# EAGLE board open-lux-T (EAGLE 6.5.0)
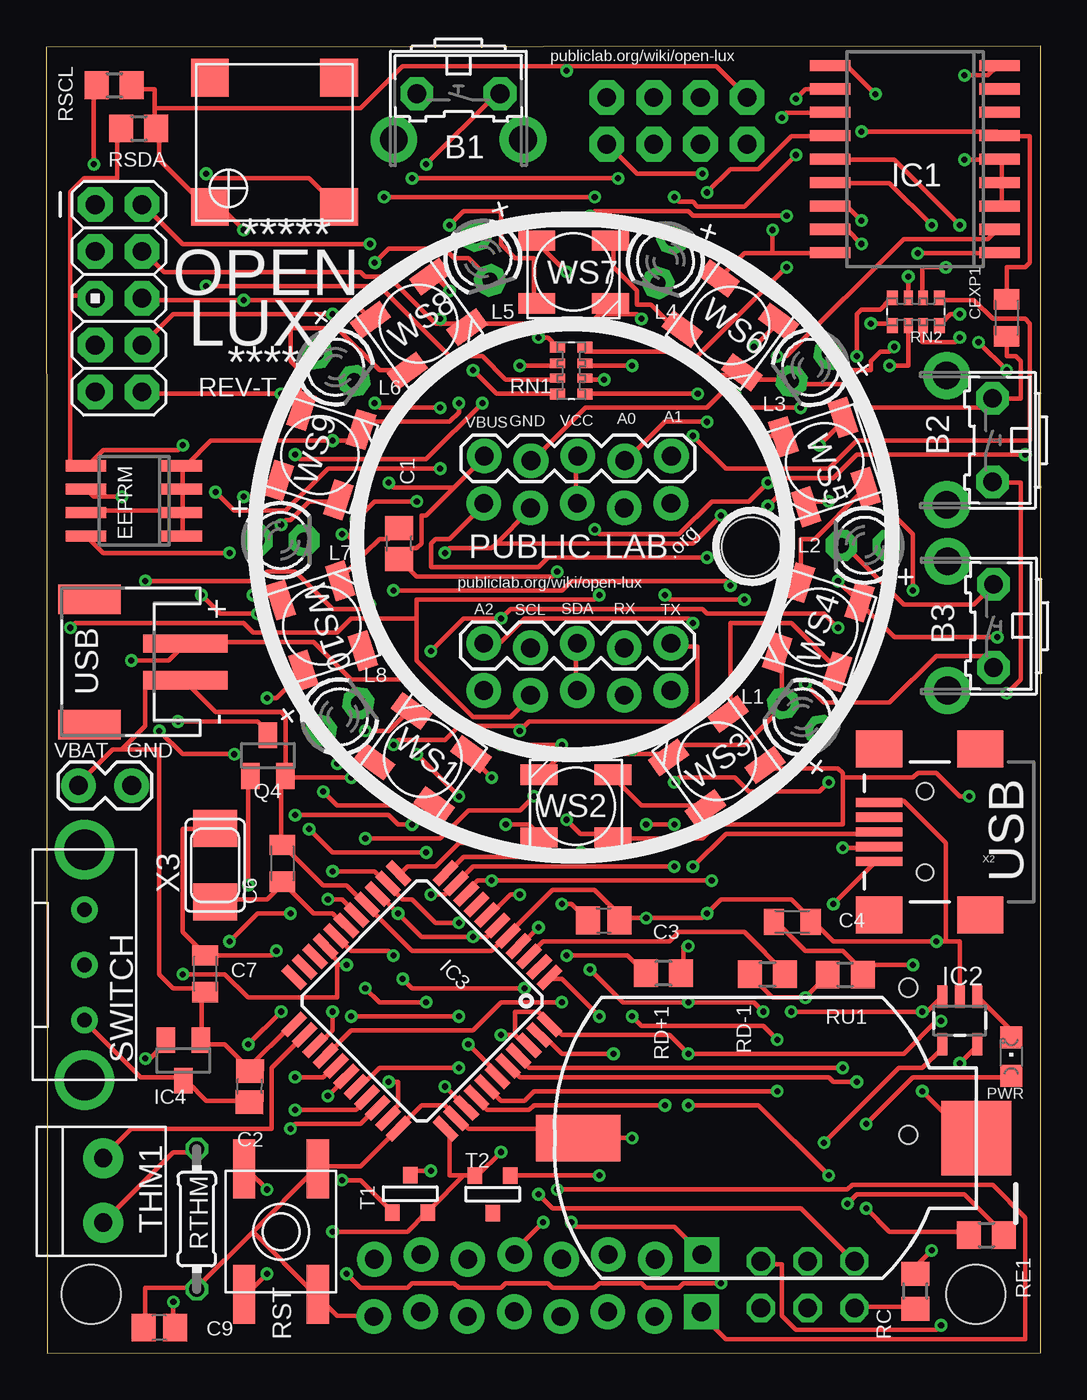
[diagram p0: board, top side]
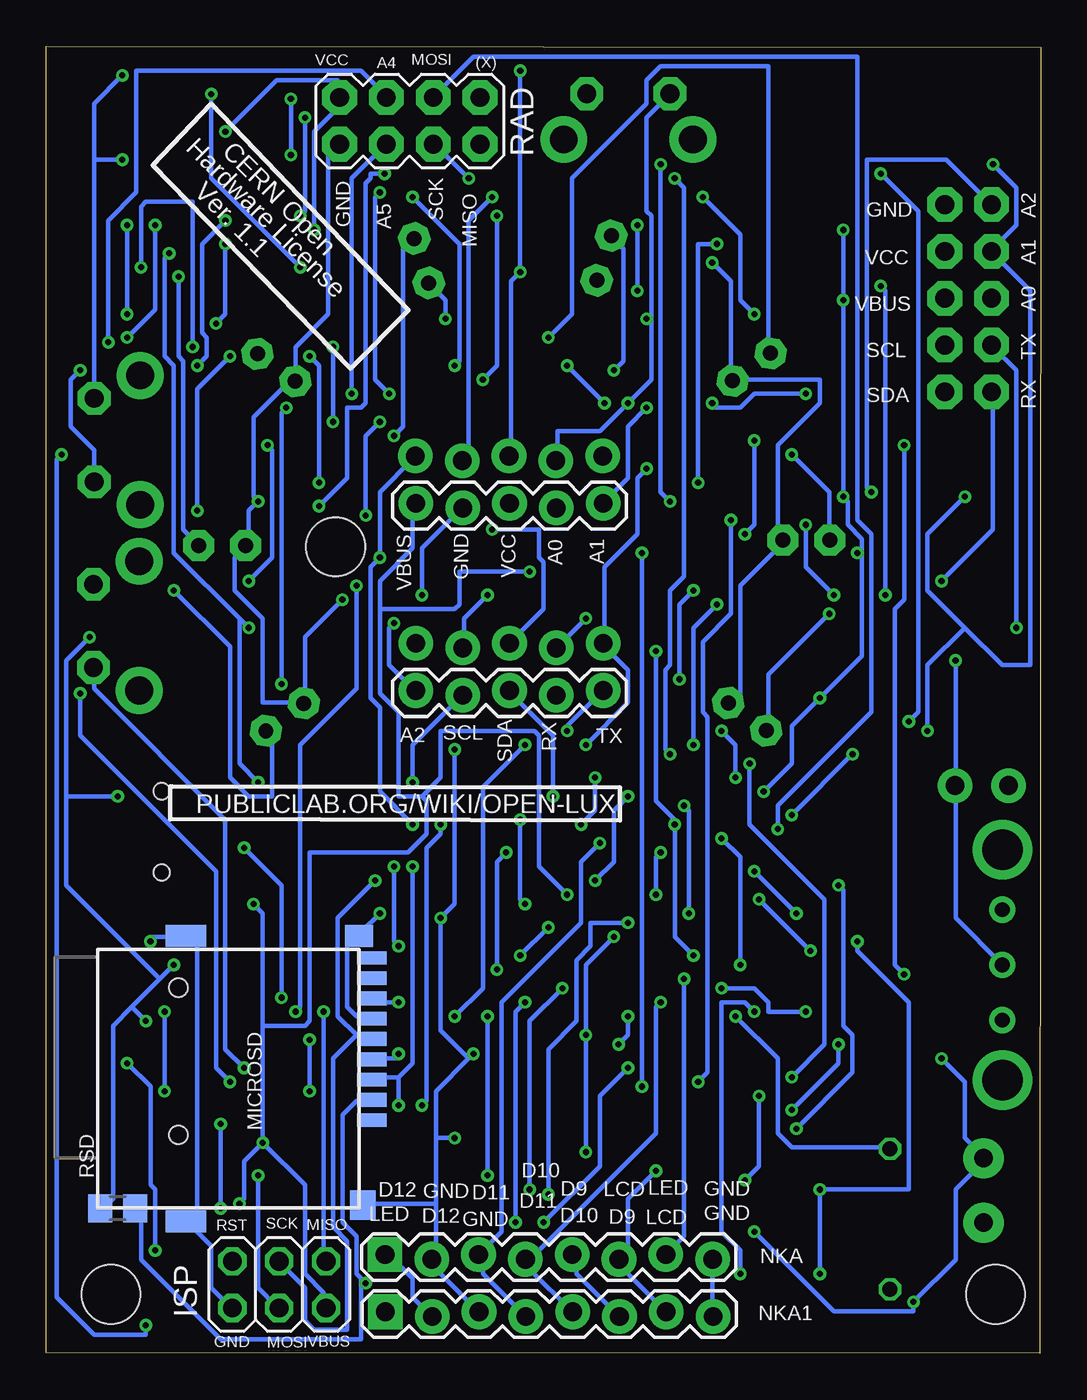
[diagram p1: board, bottom side, seen from below]

Size 53.98 x 70.93 mm. Coordinates in mm from the lower left corner, seen from the top.
Outline: 0.05,0 53.97,0.03 53.97,70.93 0,70.88 0.05,0
Copper layers (1*16): Top 0.0356mm / dielectric 1.5011mm / Bottom 0.0356mm
Design rules "LaenPCBOrder": minimum track width 6mil, minimum drill 13mil, track to track 6mil, track to pad 6mil, pad to pad 6mil, via to via 6mil, smd to smd 6mil, copper to edge 15mil, drill to drill 6mil, minimum pad ring 7mil, minimum via ring 7mil, stop-mask expansion 3mil, vias tented up to drill 0mil, thermal gap 10mil
Net classes: 0 default: width 0.254 mm, clearance 0.254 mm; 1 power: width 0.813 mm, clearance 0.203 mm
Holes 3.2 mm at 50.45,3.2 2.45,3.2 38.26,43.76

## Footprints (pad centres in the part's own frame; a part is rotated, then mirrored left to right if it is on the bottom)
B3F-31XX = drill 1.016 pad 1.778 octagon: 1 -2.261,-1.245; 2 2.261,-1.245 | drill 1.499 pad 2.54: 3 -3.505,1.245; 4 3.505,1.245
BATTCOM_20MM_PTH_SMT = smd 4.572 x 2.54: P$1 0,0 | smd 3.81 x 4.064: P$2 21.59,0
C0805 = smd 1.3 x 1.5: 1 -0.85,0; 2 0.85,0
C0805K = smd 1.1 x 1.4: 1 -1,0; 2 1,0
SO-08 = smd 0.6 x 2.2: 1 -1.905,-2.6; 2 -0.635,-2.6; 3 0.635,-2.6; 4 1.905,-2.6; 5 1.905,2.6; 6 0.635,2.6; 7 -0.635,2.6; 8 -1.905,2.6
SO18W = smd 0.6 x 2.2: 1 -5.08,-4.6; 2 -3.81,-4.6; 3 -2.54,-4.6; 4 -1.27,-4.6; 5 0,-4.6; 6 1.27,-4.6; 7 2.54,-4.6; 8 3.81,-4.6; 9 5.08,-4.6; 10 5.08,4.6; 11 3.81,4.6; 12 2.54,4.6; 13 1.27,4.6; 14 0,4.6; 15 -1.27,4.6; 16 -2.54,4.6; 17 -3.81,4.6; 18 -5.08,4.6
SOT23-5 = smd 0.55 x 1.2: 1 -0.95,-1.3; 2 0,-1.3; 3 0.95,-1.3; 4 0.95,1.3; 5 -0.95,1.3
TQFP44 = smd 1.5 x 0.5: 1 -5.8,4; 2 -5.8,3.2; 3 -5.8,2.4; 4 -5.8,1.6; 5 -5.8,0.8; 6 -5.8,0; 7 -5.8,-0.8; 8 -5.8,-1.6; 9 -5.8,-2.4; 10 -5.8,-3.2; 11 -5.8,-4; 23 5.8,-4; 24 5.8,-3.2; 25 5.8,-2.4; 26 5.8,-1.6; 27 5.8,-0.8; 28 5.8,0; 29 5.8,0.8; 30 5.8,1.6; 31 5.8,2.4; 32 5.8,3.2; 33 5.8,4 | smd 0.5 x 1.5: 12 -4,-5.8; 13 -3.2,-5.8; 14 -2.4,-5.8; 15 -1.6,-5.8; 16 -0.8,-5.8; 17 0,-5.8; 18 0.8,-5.8; 19 1.6,-5.8; 20 2.4,-5.8; 21 3.2,-5.8; 22 4,-5.8; 34 4,5.8; 35 3.2,5.8; 36 2.4,5.8; 37 1.6,5.8; 38 0.8,5.8; 39 0,5.8; 40 -0.8,5.8; 41 -1.6,5.8; 42 -2.4,5.8; 43 -3.2,5.8; 44 -4,5.8
SOT23 = smd 1 x 1.4: 1 -0.95,-1.1; 2 0.95,-1.1; 3 0,1.1
2X03 = drill 1.016 octagon: 1 -2.54,-1.27; 2 -2.54,1.27; 3 0,-1.27; 4 0,1.27; 5 2.54,-1.27; 6 2.54,1.27
1X05_LOCK = drill 1.016 pad 1.88: 1 0,0.127; 2 2.54,-0.127; 3 5.08,0.127; 4 7.62,-0.127; 5 10.16,0.127
AVR_ICSP = drill 1.016 pad 1.88 octagon: 1 -1.27,5.08; 2 1.27,5.08; 3 -1.27,2.54; 4 1.27,2.54; 5 -1.27,0; 6 1.27,0; 7 -1.27,-2.54; 8 1.27,-2.54; 9 -1.27,-5.08; 10 1.27,-5.08
1X02_LOCK = drill 1.016 pad 1.88: 1 -0.178,0; 2 2.718,0
LED3MM = drill 0.813 pad 1.676 octagon: A -1.27,0; K 1.27,0
MICRO-SD-SOCKET-TAOBAO = smd 0.75 x 1.6: 1 2.25,10.5; 2 1.15,10.5; 3 0.05,10.5; 4 -1.05,10.5; 5 -2.15,10.5; 6 -3.25,10.5; 7 -4.35,10.5; 8 -5.45,10.5 | smd 0.7 x 1.6: CD -6.55,10.5 | smd 1.2 x 1.5: GND1 -7.75,9.8 | smd 1.6 x 1.4: GND3 6.85,10 | smd 1.2 x 2.2: P$1 7.75,0.4; P$2 -7.75,0.4 | hole 1: 3.05,0; -4.93,0
1X08_LOCK = drill 1.016 pad 1.88 square: 1 0,0.127 | drill 1.016 pad 1.88: 2 2.54,-0.127; 3 5.08,0.127; 4 7.62,-0.127; 5 10.16,0.127; 6 12.7,-0.127; 7 15.24,0.127; 8 17.78,-0.127
CHIPLED_0805 = smd 1.2 x 1.2: A 0,-1.05; C 0,1.05
2X4 = drill 1.016 pad 1.88 octagon: 1 -3.81,-1.27; 2 -3.81,1.27; 3 -1.27,-1.27; 4 -1.27,1.27; 5 1.27,-1.27; 6 1.27,1.27; 7 3.81,-1.27; 8 3.81,1.27
R0805 = smd 1.3 x 1.5: 1 -0.95,0; 2 0.95,0
EXB38V = smd 0.6 x 0.8: 1 -1.275,-0.75; 4 1.275,-0.75; 5 1.275,0.75; 8 -1.275,0.75 | smd 0.5 x 0.8: 2 -0.4,-0.75; 3 0.4,-0.75; 6 0.4,0.75; 7 -0.4,0.75
EVQ-Q2 = smd 3.2 x 1.2: A -3.4,-2; A' 3.4,-2; B -3.4,2; B' 3.4,2
0204/7 = drill 0.813 octagon: 1 -3.81,0; 2 3.81,0
EG1206 = drill 0.8 pad 1.422: 1 -3,0; 2 0,0; 3 3,0 | drill 2.2: MT1 -6.25,0; MT2 6.25,0
SOT-23 = smd 0.787 x 0.889: 1 0.025,-1.016; 2 -0.94,1.016; 3 0.991,1.016
1X2-3.5MM = drill 1 pad 2.184: 1 1.8,0; 2 -1.7,0
SMT-8585-BUZZER = smd 2.05 x 2.05: + -3.5,-3.5; - 3.5,-3.5; NC1 -3.5,3.5; NC2 3.5,3.5
JST-PH-2-SMT-RA = smd 1 x 4.6: 1 1,-3.7; 2 -1,-3.7 | smd 1.6 x 3.4: NC1 -3.4,1.5; NC2 3.4,1.5
RGBLED5050_4 = smd 2 x 1.1: D -2,1.7; I 2,1.7; O -2,-1.7; S 2,-1.7
USB-MINIB = smd 2.5 x 0.5: D+ 2.5,0; D- 2.5,0.8; GND 2.5,-1.6; ID 2.5,-0.8; VBUS 2.5,1.6 | smd 2.5 x 2: GND@1 -3,-4.5; GND@2 -3,4.5; GND@3 2.5,4.5; GND@4 2.5,-4.5 | hole 0.9: 0,2.2; 0,-2.2
NX5032 = smd 2 x 2.4: P$1 2,0; P$2 -2,0

## Placement (x,y rotation side)
B1  [B3F-31XX]  22.38,67.11 180 top
B2  [B3F-31XX]  50.11,49.56 90 top
B3  [B3F-31XX]  50.16,39.47 90 top
BAT1  LIR2032  [BATTCOM_20MM_PTH_SMT]  28.88,11.68 0 top
C1  10u  [C0805]  19.15,43.94 90 top
C2  10u  [C0805]  11.05,14.48 89 top
C3  10u  [C0805]  30.25,23.5 0 top
C4  [C0805K]  40.49,23.42 0 top
C6  18pF  [C0805K]  12.83,26.59 90 top
C7  18pF  [C0805K]  8.64,20.6 270 top
C9  0.1uF  [C0805]  6.15,1.4 180 top
CEXP1  .1uF  [C0805K]  52.12,56.18 270 top
EEPRM  24AA128SN  [SO-08]  4.78,46.25 90 top
IC1  MCP23008  [SO18W]  47.14,64.8 90 top
IC2  MCP73831  [SOT23-5]  49.58,18.06 180 top
IC3  ATMEGA32U4-AU  [TQFP44]  20.4,19.13 225 top
IC4  MCP1700-33  [SOT23]  7.44,15.9 180 top
ISP  [2X03]  41.33,3.73 180 bottom
JP1  [1X05_LOCK]  23.75,38.4 0 top
JP2  M05X2PTH  [AVR_ICSP]  3.94,57.25 0 top
JP3  [1X05_LOCK]  23.77,48.56 0 top
JP4  M02LOCK  [1X02_LOCK]  1.93,30.81 0 top
JP5  [1X05_LOCK]  33.91,35.84 0 bottom
JP6  [1X05_LOCK]  33.91,46 0 bottom
LED1  [LED3MM]  41.02,34.52 144 top
LED2  [LED3MM]  44.42,43.84 180 top
LED3  [LED3MM]  41.48,53.49 216 top
LED4  [LED3MM]  33.6,59.28 252 top
LED5  [LED3MM]  23.7,59.44 288 top
LED6  [LED3MM]  15.7,53.52 324 top
LED7  [LED3MM]  12.73,44.12 0 top
LED8  [LED3MM]  15.93,34.54 36 top
MICROSD  USD-SOCKETMICRO-SD-SOCKET-TAOBAO  [MICRO-SD-SOCKET-TAOBAO]  46.79,14.91 270 bottom
NKA  [1X08_LOCK]  35.59,5.23 0 bottom
NKA1  [1X08_LOCK]  35.56,2.13 0 bottom
PWR  0805  [CHIPLED_0805]  52.37,16.1 0 top
Q4  BSS123  [SOT23]  12.04,32.44 0 top
RAD  M04X2  [2X4]  34.24,66.88 0 bottom
RC  22K  [R0805]  47.17,3.38 90 top
RD+1  47  [R0805]  33.5,20.62 180 top
RD-1  47  [R0805]  39.14,20.57 0 top
RE1  1.5K  [R0805]  51.03,6.43 0 top
RN1  [EXB38V]  28.5,53.31 90 top
RN2  [EXB38V]  47.19,56.52 0 top
RSCL  10K  [R0805]  3.71,68.81 0 top
RSD  10K  [R0805]  50.09,7.87 180 bottom
RSDA  10K  [R0805]  5.03,66.47 0 top
RST  [EVQ-Q2]  12.75,6.6 90 top
RTHM  3k  [0204/7]  8.18,7.29 90 top
RU1  1.5K  [R0805]  43.36,20.55 0 top
SWITCH  EG1206  [EG1206]  2.08,21.08 270 top
T1  FDN340P  [SOT-23]  19.79,8.66 180 top
T2  FDN340P  [SOT-23]  24.21,8.64 0 top
THM1  1X2-3.5MM  [1X2-3.5MM]  3.1,8.89 270 top
U$1  BUZZER  [SMT-8585-BUZZER]  12.4,65.71 0 top
USB  [JST-PH-2-SMT-RA]  3.86,37.52 90 top
WS1  WS2813  [RGBLED5050_4]  20.45,32.31 144 top
WS2  WS2813  [RGBLED5050_4]  28.75,29.69 180 top
WS3  WS2813  [RGBLED5050_4]  36.4,32.13 216 top
WS4  WS2813  [RGBLED5050_4]  41.91,39.4 252 top
WS5  WS2813  [RGBLED5050_4]  42.24,48.36 288 top
WS6  WS2813  [RGBLED5050_4]  37.13,55.78 324 top
WS7  WS2813  [RGBLED5050_4]  28.63,58.67 0 top
WS8  WS2813  [RGBLED5050_4]  20.22,55.88 36 top
WS9  WS2813  [RGBLED5050_4]  14.86,48.74 72 top
WS10  WS2813  [RGBLED5050_4]  14.96,39.5 108 top
X2  USBSMD  [USB-MINIB]  47.7,28.3 180 top
X3  8MHz  [NX5032]  9.17,26.49 90 top

## Library data of the parts
B1-B3 C6 C7 C9 CEXP1 IC4 LED1-LED8 RST SWITCH THM1 U$1 USB WS1-WS10 = adafruit
BAT1 IC2 MICROSD = SparkFunNew
C1-C3 = resistor
C4 = adafruit2013
EEPRM = microchip; MF: MICROCHIP; MPN: 24AA128-I/SN; OC_FARNELL: unknown; OC_NEWARK: 92C6842
IC1 = JeeLabs
IC3 X3 = adaprog
ISP = pinhead
JP1-JP6 NKA NKA1 RAD = SparkFun-Connectors
PWR = led
Q4 = transistor-small-signal
RC RD+1 RD-1 RE1 RSCL RSD RSDA RTHM RU1 = rcl
RN1 RN2 = resistor-dil; OC_FARNELL: unknown; OC_NEWARK: unknown
T1 T2 = zetex
X2 = SparkFun

## Nets
A0: IC3.36 JP2.8 JP3.4 JP6.4
A1: IC3.37 JP2.10 JP3.5 JP6.5
A2: IC3.38 JP1.1 JP2.1 JP5.1
A3: IC3.39 RTHM.2 THM1.1
A4: B2.1 IC3.40 RAD.4
A5: B3.1 IC3.41 RAD.3
D4: IC3.25 MICROSD.2 RSD.1
D5: IC3.31 Q4.1
D6: IC3.27 WS1.I
D7: IC3.1 T2.3
D8: IC3.28 T1.3
D9: IC3.29 NKA1.6 NKA.5
D10: IC3.30 NKA1.5 NKA.4
D11: IC3.12 NKA1.4 NKA.3
D12: IC3.26 NKA1.2 NKA.1
D13: B1.1 IC3.32
D+: RD+1.1 X2.D+
D-: RD-1.1 RU1.1 X2.D-
GND: B1.2 B2.2 B3.2 BAT1.P$1 C1.2 C2.2 C3.2 C4.2 C6.2 C7.2 C9.2 CEXP1.2 EEPRM.1 EEPRM.2 EEPRM.3 EEPRM.4 EEPRM.7 IC1.3 IC1.4 IC1.5 IC1.9 IC2.2 IC3.5 IC3.15 IC3.23 IC3.33 IC3.35 IC3.43 IC4.1 ISP.6 JP2.4 JP3.2 JP4.1 JP6.2 LED1.K LED2.K LED3.K LED4.K MICROSD.6 MICROSD.GND1 MICROSD.GND3 MICROSD.P$1 MICROSD.P$2 NKA1.3 NKA1.8 NKA.2 NKA.8 Q4.2 RAD.1 RC.1 RST.A RST.A' RTHM.1 USB.2 WS1.S WS2.S WS3.S WS4.S WS5.S WS6.S WS7.S WS8.S WS9.S WS10.S X2.GND
MISO: IC3.11 ISP.1 MICROSD.7 RAD.7
MOSI: IC3.10 ISP.4 MICROSD.3 RAD.6
N$1: C2.1 IC4.3 SWITCH.3
N$2: C7.1 IC3.16 X3.P$1
N$3: C6.1 IC3.17 X3.P$2
N$4: WS9.O WS10.I
N$5: IC2.1 PWR.C
N$6: IC2.5 RC.2
N$7: Q4.3 U$1.-
N$8: IC1.14 RN2.4
N$9: T2.1
N$10: PWR.A RE1.1
N$11: IC1.15 RN2.3
N$12: NKA1.1 NKA.7
N$13: IC1.16 RN2.2
N$14: WS6.O WS7.I
N$15: IC1.17 RN2.1
N$17: LED1.A RN2.8
N$18: LED2.A RN2.7
N$19: WS4.O WS5.I
N$20: WS5.O WS6.I
N$21: IC3.4 RD+1.2
N$22: IC3.3 RD-1.2
N$23: WS1.O WS2.I
N$24: WS2.O WS3.I
N$25: WS3.O WS4.I
N$26: LED3.A RN2.6
N$27: WS8.O WS9.I
N$28: WS7.O WS8.I
N$29: LED4.A RN2.5
N$30: LED5.K LED6.K LED7.K LED8.K
N$31: NKA1.7 NKA.6 T1.1
N$32: LED5.A RN1.8
N$33: LED6.A RN1.5
N$34: LED7.A RN1.6
N$35: LED8.A RN1.7
N$37: IC1.13 RN1.1
N$38: IC1.12 RN1.2
N$39: IC1.11 RN1.3
N$40: IC1.10 RN1.4
RESET: IC3.13 ISP.5 RST.B RST.B'
RX: JP1.4 JP2.7 JP5.4
RXD: IC3.20
RXLED/SS: IC3.8
SCK: IC3.9 ISP.3 MICROSD.5 RAD.5
SCL: EEPRM.6 IC1.1 IC3.18 JP1.2 JP2.3 JP5.2 RSCL.1
SDA: EEPRM.5 IC1.2 IC3.19 JP1.3 JP2.5 JP5.3 RSDA.1
TX: JP1.5 JP2.9 JP5.5
TXD: IC3.21
TXLED: IC3.22
VBAT: BAT1.P$2 IC2.3 JP4.2 SWITCH.2 USB.1
VBUS: C1.1 IC2.4 IC3.7 ISP.2 JP2.2 JP3.1 JP6.1 RE1.2 X2.VBUS
VCC: C3.1 C4.1 C9.1 CEXP1.1 EEPRM.8 IC1.6 IC1.18 IC3.6 IC3.14 IC3.24 IC3.34 IC3.42 IC3.44 IC4.2 JP2.6 JP3.3 JP6.3 MICROSD.4 RAD.2 RSCL.2 RSD.2 RSDA.2 RU1.2 T1.2 T2.2 THM1.2 U$1.+ WS1.D WS2.D WS3.D WS4.D WS5.D WS6.D WS7.D WS8.D WS9.D WS10.D

## Tracks (layer width: path | path; a pad name or v marks a point on that pad's centre or on a via)
A0  (via drill 0.33)
  Top 0.254: v21.64,14.48 22.66,13.46 IC3.36 | v21.64,43.43 21.89,43.69 24.18,43.69 24.43,43.94 | 24.43,43.94 26.21,45.72 JP6.4 | v35.86,50.55 33.58,50.55 31.55,48.51 JP3.4 | v36.63,45.47 35.1,43.94 24.43,43.94 | v15.54,56.39 6.91,56.39 5.38,54.86 JP2.8 | v29.77,62.74 v18.34,62.74
  Bottom 0.254: v21.64,43.43 v21.64,14.48 | v35.86,50.55 36.63,49.78 v36.63,45.47 | v15.54,56.39 16.31,57.15 16.31,60.71 v18.34,62.74 | v29.77,62.74 31.04,61.47 31.04,48.77 31.29,48.51 JP3.4
A1  (via drill 0.33)
  Top 0.254: v33.58,13.46 26.47,13.46 26.21,13.21 23.93,13.21 23.42,13.72 IC3.37 | v34.09,28.7 v32.56,28.7 | v35.86,43.18 27.23,43.18 26.72,42.67 20.88,42.67 20.88,43.94 21.13,44.2 21.89,44.2 23.67,45.97 JP6.5 | v12.75,52.07 5.38,52.07 JP2.10 | v17.83,51.56 18.08,51.31 v21.39,51.31
  Bottom 0.254: v33.58,13.46 33.32,13.72 33.32,27.43 32.56,28.19 v32.56,28.7 | v34.09,28.7 35.86,30.48 35.86,35.05 36.37,35.56 36.37,42.67 v35.86,43.18 35.86,46.74 34.09,48.51 JP3.5 | v12.75,52.07 15.54,52.07 16.31,51.31 17.83,51.31 v17.83,51.56 | v21.39,51.31 22.4,50.29 22.4,47.5 23.67,46.23 JP6.5
A2  (via drill 0.33)
  Top 0.254: v39.67,14.22 26.47,14.22 25.96,13.72 24.69,13.72 24.18,14.22 IC3.38 | v39.67,17.02 38.91,17.78 32.31,17.78 v31.8,18.29 | v24.69,33.02 v27.99,33.02 | v9.19,46.74 10.21,45.72 13,45.72 15.29,48.01 v21.39,48.01 | v35.1,39.62 34.85,39.88 25.96,39.88 24.69,38.61 23.93,38.61 JP1.1
  Bottom 0.254: v39.67,17.02 v39.67,14.22 | v31.8,18.29 30.28,19.81 30.28,30.73 v27.99,33.02 | v24.69,33.02 22.4,35.31 22.4,37.08 23.67,38.35 JP1.1 23.67,38.61 23.67,42.67 21.89,44.45 21.89,47.5 v21.39,48.01 | v9.19,46.74 9.45,46.99 9.45,64.77 5.13,64.77 2.84,62.48 JP2.1 | v35.1,39.62 35.36,39.37 35.36,37.34 34.09,36.07 JP5.1
A3  (via drill 0.33)
  Top 0.254: v22.91,16.76 24.43,15.24 IC3.39 | v16.56,18.29 v22.4,18.29 | THM1.1 3.1,7.11 6.91,10.92 8.18,10.92 RTHM.2
  Bottom 0.254: v22.91,16.76 22.4,17.27 v22.4,18.29 | v16.56,18.29 14.27,16 14.27,11.94 13.51,11.18 8.18,11.18 RTHM.2
A4  (via drill 0.33)
  Top 0.254: v43.99,14.73 42.72,14.73 42.47,14.99 25.7,14.99 25.2,15.49 IC3.40 | v52.12,35.81 52.88,36.58 52.88,47.24 51.36,47.24 B2.1 | v52.12,53.34 v50.6,54.86
  Bottom 0.254: v43.99,14.73 44.75,15.49 44.75,26.16 52.12,33.53 v52.12,35.81 | v50.6,54.86 50.6,61.47 49.07,62.99 49.07,69.6 36.88,69.6 35.61,68.33 RAD.4 | v52.12,53.34 52.63,52.83 52.63,50.29 51.36,49.02 B2.1
A5  (via drill 0.33)
  Top 0.254: v43.23,15.49 26.21,15.49 25.7,16 IC3.41 | v37.39,52.07 38.15,51.31 v40.94,51.31 | v41.2,36.32 42.21,35.31 45.77,35.31 48.31,37.85 50.85,37.85 51.36,37.34 B3.1
  Bottom 0.254: v43.23,15.49 44.25,16.51 44.25,28.96 51.36,36.07 51.36,37.08 B3.1 | v37.39,52.07 37.39,63.75 35.61,65.53 RAD.3 | v40.94,51.31 41.2,51.05 v41.2,36.32
D4  (via drill 0.33)
  Top 0.254: v15.54,18.54 15.54,17.53 14.78,16.76 IC3.25 | v16.31,4.32 17.07,3.56 19.61,3.56 19.86,3.81 22.15,3.81 22.4,3.56 24.69,3.56 24.94,3.81 27.23,3.81 27.48,3.56 29.77,3.56 30.02,3.81 32.31,3.81 32.56,3.56 34.34,3.56 34.59,3.81 v36.63,3.81
  Bottom 0.254: v15.54,18.54 16.05,19.05 17.32,19.05 17.32,6.6 16.31,5.59 v16.31,4.32 | 36.88,4.06 37.13,4.32 37.13,6.35 37.9,7.11 37.9,12.95 37.13,13.72 36.37,13.72 MICROSD.2 | 36.88,4.06 v36.63,3.81 | 36.88,4.06 36.88,0.76 44.5,0.76 48.82,5.08 48.82,7.62 49.07,7.87 RSD.1
D5  (via drill 0.33)
  Top 0.254: v10.97,25.4 10.97,31.24 Q4.1 | v13.26,12.19 13.51,12.45 17.07,12.45 17.83,13.21 IC3.31
  Bottom 0.254: v10.97,25.4 10.72,25.15 10.72,17.78 10.21,17.27 10.21,15.24 v13.26,12.19
D6  (via drill 0.33)
  Top 0.254: v13.51,14.99 15.04,14.99 15.54,15.49 IC3.27 | v15.8,32 17.58,32 WS1.I
  Bottom 0.254: v13.51,14.99 11.73,16.76 11.73,24.64 15.8,28.7 v15.8,32
D7  (via drill 0.33)
  Top 0.254: v30.02,9.65 T2.3 | v30.02,18.29 27.99,20.32 27.48,20.32 IC3.1
  Bottom 0.254: v30.02,18.29 v30.02,9.65
D8  (via drill 0.33)
  Top 0.254: v16.05,9.4 17.07,9.4 18.59,7.87 T1.3 | v15.29,13.97 16.31,14.99 IC3.28
  Bottom 0.254: v16.05,9.4 15.29,10.16 v15.29,13.97
D9  (via drill 0.33)
  Top 0.254: v22.4,15.49 18.08,15.49 17.07,14.48 IC3.29 | v26.97,7.11 25.45,5.59 NKA.5
  Bottom 0.254: v22.4,15.49 23.93,13.97 23.93,10.16 v26.97,7.11 | NKA1.6 22.91,2.03 25.2,4.32 25.2,5.33 NKA.5
D10  (via drill 0.33)
  Top 0.254: v13.51,13.21 16.81,13.21 17.32,13.72 IC3.30 | v12.75,18.54 v10.97,16.76 | v17.32,19.81 18.08,19.05 v20.62,19.05
  Bottom 0.254: v13.51,13.21 10.97,15.75 v10.97,16.76 | v12.75,18.54 14.78,18.54 14.78,19.05 15.54,19.81 v17.32,19.81 | v20.62,19.05 20.88,18.8 20.88,11.94 27.74,5.08 | 27.74,5.08 27.74,4.57 25.45,2.29 NKA1.5 | 27.74,5.08 NKA.4
D11  (via drill 0.33)
  Top 0.254: v23.93,27.69 22.4,27.69 21.13,26.42 19.61,26.42 19.35,26.16 IC3.12
  Bottom 0.254: v23.93,27.69 24.94,26.67 24.94,23.37 29.26,19.05 29.26,6.6 NKA.3 30.28,5.33 30.28,4.32 27.99,2.03 NKA1.4
D12  (via drill 0.33)
  Top 0.254: v27.99,19.05 24.69,19.05 23.16,17.53 16.56,17.53 15.29,16.26 IC3.26 | v28.5,7.11 28.75,6.86 34.09,6.86 NKA.1
  Bottom 0.254: v27.99,19.05 28.5,18.54 v28.5,7.11 | NKA1.2 33.07,2.03 34.09,3.05 34.09,4.06 35.36,5.33 NKA.1
D13  (via drill 0.33)
  Top 0.254: v18.59,14.73 19.1,14.73 19.1,13.46 18.59,12.95 IC3.32 | v16.81,45.21 17.83,46.23 v20.12,46.23 | v20.62,64.52 24.43,68.33 B1.1
  Bottom 0.254: v18.59,14.73 18.08,15.24 18.08,34.54 18.34,34.8 18.34,38.61 16.81,40.13 v16.81,45.21 | v20.12,46.23 20.62,46.74 v20.62,64.52
D+  (via drill 0.33)
  Top 0.254: v34.85,22.1 34.59,22.1 34.59,20.83 RD+1.1 | v35.1,26.42 36.88,28.19 45.01,28.19 X2.D+
  Bottom 0.254: v34.85,22.1 35.1,22.35 v35.1,26.42
D-  (via drill 0.33)
  Top 0.254: RU1.1 42.21,20.32 v41.2,19.3 39.42,19.3 38.15,20.57 RD-1.1 | v43.23,27.43 45.01,27.43 X2.D-
  Bottom 0.254: v43.23,27.43 41.2,25.4 v41.2,19.3
GND  (via drill 0.33)
  Top 0.254: v30.78,16.26 27.99,16.26 26.97,17.27 IC3.43 | NKA1.8 17.58,2.03 15.8,2.03 14.78,3.05 RST.A 14.53,3.3 11.23,6.6 | 8.18,3.56 5.38,3.56 5.38,1.52 C9.2 | 11.23,6.6 14.53,9.91 RST.A' 14.78,10.16 17.07,10.16 19.1,12.19 IC3.33 19.35,12.45 20.37,13.46 21.64,13.46 22.15,12.95 IC3.35 22.4,12.7 22.91,12.19 28.24,12.19 28.75,11.68 BAT1.P$1 v31.8,11.68 | 11.23,6.6 8.18,3.56 | 8.18,3.56 RTHM.1 | 10.97,15.49 9.7,16.76 8.43,16.76 IC4.1 8.43,17.02 8.43,19.56 C7.2 8.43,19.81 6.91,19.81 6.15,20.57 6.15,32.77 4.11,32.77 | 10.97,15.49 13.26,17.78 IC3.23 | 10.97,15.49 C2.2 | 4.11,32.77 3.61,32.77 1.83,30.99 JP4.1 | 4.11,32.77 5.38,34.04 5.38,36.32 7.42,36.32 USB.2 7.67,36.32 9.19,34.8 12.75,34.8 13,34.54 13,31.5 Q4.2 | RC.1 47.04,2.54 43.99,2.54 ISP.6 | Q4.2 12.75,31.24 12.75,27.69 C6.2 13,27.43 15.04,25.4 16.31,25.4 17.32,24.38 IC3.15 17.58,24.13 19.86,21.84 24.18,21.84 24.94,22.61 IC3.5 25.2,22.86 27.48,25.15 29.77,25.15 31.29,23.62 | v17.32,33.78 18.59,33.78 19.61,34.8 WS1.S | v16.56,31.24 13,31.24 Q4.2 | 31.29,23.62 v32.56,23.62 35.61,23.62 v35.86,23.88 36.63,24.64 40.44,24.64 41.45,23.62 C4.2 41.71,23.37 42.72,22.35 v48.31,22.35 48.82,22.35 | 31.29,23.62 C3.2 | IC2.2 49.58,22.35 48.82,22.35 | 48.82,22.35 48.82,27.69 46.53,29.97 45.26,29.97 X2.GND | 30.02,56.39 30.53,56.9 WS7.S | 30.02,56.39 29.51,55.88 22.91,55.88 WS8.S 22.66,55.88 21.39,55.88 | v32.31,56.13 32.05,56.39 30.02,56.39 | 21.39,55.88 21.13,55.88 18.59,58.42 17.32,58.42 17.07,58.67 6.4,58.67 5.38,59.69 JP2.4 | EEPRM.7 2.34,45.72 7.16,45.72 EEPRM.2 | EEPRM.1 7.42,44.45 7.42,45.47 EEPRM.2 | 17.32,43.43 16.05,42.16 WS10.S
  Top 0.254: 17.32,43.43 18.08,44.2 18.59,44.2 19.1,44.7 C1.2 | 17.32,43.43 16.31,44.45 v16.05,44.45 | EEPRM.2 7.42,45.72 7.42,46.74 EEPRM.3 7.42,46.99 7.42,48.01 EEPRM.4 7.42,48.26 7.67,48.26 8.94,49.53 v15.54,49.53 16.56,49.53 17.07,50.04 WS9.S 17.32,50.29 17.58,50.55 21.89,50.55 22.4,51.05 v22.4,51.56 | v21.39,56.13 21.39,55.88 | 31.8,32.51 33.58,32.51 WS3.S 33.83,32.51 34.34,33.02 37.9,33.02 39.93,35.05 LED1.K 39.93,35.31 39.93,37.85 WS4.S | 31.8,32.51 29.77,32.51 29.51,32.26 27.74,32.26 26.97,31.5 WS2.S | v33.58,41.15 33.83,40.89 v37.9,40.89 | IC1.3 51.87,62.48 51.87,63.5 IC1.4 51.87,63.75 51.87,64.77 IC1.5 51.61,64.77 v49.83,64.77 | CEXP1.2 52.12,54.1 52.63,54.1 52.88,53.85 52.88,51.82 B2.2 50.85,51.31 44.75,51.31 43.48,52.58 40.69,52.58 LED3.K 40.44,52.83 38.15,52.83 37.9,53.09 WS6.S 37.64,53.09 36.63,53.09 36.63,52.07 35.86,51.31 29.26,51.31 26.47,48.51 JP3.2 | v49.83,69.34 51.1,69.34 51.61,69.85 IC1.9 | v42.47,46.23 41.71,46.23 41.45,45.97 WS5.S | B3.2 51.36,41.66 50.34,40.64 46.53,40.64 43.48,43.69 43.23,43.69 LED2.K | 31.8,32.51 v31.8,32.77
  Bottom 0.254: 31.04,16 32.82,14.22 32.82,11.68 | 31.04,16 v30.78,16.26 | 32.82,8.13 32.82,5.33 NKA.2 32.82,5.08 32.82,4.57 30.53,2.29 NKA1.3 | 32.82,8.13 32.82,11.68 | 32.82,8.13 36.63,8.13 MICROSD.GND3 | NKA.8 17.83,5.08 17.83,2.03 NKA1.8 | v31.8,11.68 32.82,11.68 | 45.77,6.6 45.01,5.84 45.01,3.56 43.99,2.54 ISP.6 | 45.77,6.6 46.28,7.11 MICROSD.P$1 45.77,6.6 | 45.77,6.6 45.77,22.1 46.28,22.61 MICROSD.P$2 46.53,22.61 48.31,22.61 v48.31,22.35 | v17.32,33.78 16.56,33.02 v16.56,31.24 | MICROSD.6 36.37,18.29 37.13,18.29 37.64,18.8 37.64,22.1 37.13,22.61 MICROSD.GND1 36.88,22.86 v35.86,23.88 | 31.04,16 32.56,17.53 v32.56,23.62 31.8,24.38 v31.8,32.77 | v32.31,56.13 32.31,57.15 33.07,57.91 LED4.K | v16.05,44.45 15.54,44.96 v15.54,49.53 | 21.13,56.13 21.13,52.83 v22.4,51.56 23.93,50.04 26.21,50.04 26.21,48.51 JP3.2 | 21.13,56.13 21.13,61.72 21.39,61.98 21.39,67.06 20.12,68.33 B1.2 | 21.13,56.13 v21.39,56.13 | v33.58,41.15 33.58,43.69 31.55,45.72 JP6.2 | v37.9,40.89 39.93,38.86 39.93,35.31 LED1.K 40.18,35.31 42.21,35.31 42.21,39.88 43.74,41.4 43.74,43.18 43.23,43.69 LED2.K 42.98,43.94 42.98,45.72 v42.47,46.23 42.72,46.48 42.72,50.8 40.69,52.83 LED3.K 40.44,52.83 40.44,54.61 38.66,56.39 38.66,65.02 38.15,65.53 RAD.1 | v49.83,69.34 51.36,67.82 51.36,64.77 | B2.2 51.36,64.77 | 51.36,64.77 v49.83,64.77
MISO  (via drill 0.33)
  Top 0.254: v29.01,27.18 28.75,26.92 22.66,26.92 21.89,26.16 IC3.11 | v29.51,20.83 31.29,19.05 v34.85,19.05 38.4,19.05 v38.91,18.54 | v35.61,64.01 32.05,64.01 30.53,65.53 RAD.7 | v39.17,45.97 39.93,46.74 39.93,47.5 42.72,47.5 43.99,48.77 v53.14,48.77 | v48.56,1.52 48.31,1.27 40.69,1.27 39.93,2.03 39.93,4.83 38.91,4.83 ISP.1
  Bottom 0.254: v29.01,27.18 29.51,26.67 v29.51,20.83 | v34.85,19.05 36.12,19.05 MICROSD.7 | v38.91,18.54 38.91,5.08 ISP.1 | v35.61,64.01 36.37,64.01 36.37,63.75 36.63,63.5 36.63,51.56 36.88,51.31 37.64,51.31 37.64,47.5 v39.17,45.97 | v53.14,48.77 53.39,48.51 53.39,3.05 51.36,1.02 48.56,1.02 v48.56,1.52
MOSI  (via drill 0.33)
  Top 0.254: v34.09,26.42 23.16,26.42 22.4,25.65 IC3.10 22.15,25.4 21.64,24.89 v20.88,24.89 | v42.47,9.65 38.66,13.46 v34.85,13.46 | v14.27,28.45 15.54,27.18 v20.62,27.18
  Bottom 0.254: v34.09,26.42 34.09,15.75 34.85,14.99 | 34.85,14.99 36.12,14.99 MICROSD.3 | v42.47,9.65 42.47,3.56 41.45,2.54 ISP.4 | 34.85,14.99 v34.85,13.46 | v14.27,28.45 14.27,29.72 9.19,34.8 9.19,44.45 9.96,45.21 9.96,70.36 30.78,70.36 32.82,68.33 RAD.6 | v20.62,27.18 20.88,26.92 v20.88,24.89
N$1
  Top 0.254: C2.1 10.97,13.72 8.69,13.72 7.67,14.73 IC4.3 7.42,14.99 5.13,14.99 2.08,18.03 SWITCH.3
N$2  (via drill 0.33)
  Top 0.254: X3.P$1 8.94,28.45 7.42,28.45 7.42,22.86 8.43,21.84 C7.1 8.69,21.59 12.24,21.59 v12.5,21.84 | v15.29,24.64 16.05,24.64 16.81,23.88 IC3.16
  Bottom 0.254: v12.5,21.84 v15.29,24.64
N$3
  Top 0.254: X3.P$2 9.19,24.64 11.99,24.64 12.75,25.4 C6.1 13,25.4 14.53,23.88 15.54,23.88 16.05,23.37 IC3.17
N$4  (via drill 0.33)
  Top 0.254: v11.23,41.15 12.24,41.15 12.5,40.89 WS10.I | v12.75,44.96 13,45.21 13.26,45.21 14.27,46.23 15.8,46.23 WS9.O
  Bottom 0.254: v11.23,41.15 12.75,42.67 v12.75,44.96
N$5
  Top 0.254: PWR.C 52.37,17.53 50.6,19.3 IC2.1
N$6  (via drill 0.33)
  Top 0.254: v49.58,15.75 50.34,16.51 IC2.5 | v48.06,5.59 47.04,4.57 RC.2
  Bottom 0.254: v49.58,15.75 48.31,14.48 48.31,9.14 48.06,8.89 v48.06,5.59
N$7  (via drill 0.33)
  Top 0.254: v7.16,34.29 11.48,34.29 11.99,33.78 Q4.3 | v8.69,64.01 8.94,63.75 14.27,63.75 15.8,62.23 U$1.-
  Bottom 0.254: v7.16,34.29 6.65,34.8 6.65,61.98 v8.69,64.01
N$8  (via drill 0.33)
  Top 0.254: v49.58,56.39 49.07,56.39 48.56,55.88 RN2.4 | v49.58,61.21 46.02,64.77 42.72,64.77 IC1.14
  Bottom 0.254: v49.58,61.21 v49.58,56.39
N$10  (via drill 0.33)
  Top 0.254: v44.5,12.45 47.04,14.99 52.37,14.99 PWR.A | v44.5,7.87 45.77,6.6 49.83,6.6 RE1.1
  Bottom 0.254: v44.5,7.87 v44.5,12.45
N$11  (via drill 0.33)
  Top 0.254: v49.58,55.12 49.33,54.86 47.55,54.86 47.55,55.63 RN2.3 | v48.06,61.21 45.77,63.5 42.72,63.5 IC1.15
  Bottom 0.254: v49.58,55.12 48.06,56.64 v48.06,61.21
N$12  (via drill 0.33)
  Top 0.254: v19.35,20.32 19.86,19.81 v25.96,19.81 | v27.74,8.89 43.48,8.89 43.74,9.14 51.36,9.14 53.14,7.37 53.14,0.76 36.88,0.76 35.61,2.03 NKA1.1
  Bottom 0.254: NKA.7 19.35,6.35 v19.35,20.32 | v25.96,19.81 27.74,18.03 v27.74,8.89
N$13  (via drill 0.33)
  Top 0.254: v45.77,53.59 46.79,53.59 46.79,55.63 RN2.2 | v44.25,61.47 43.48,62.23 42.72,62.23 IC1.16
  Bottom 0.254: v45.77,53.59 45.26,54.1 45.26,55.12 45.52,55.37 45.52,60.2 v44.25,61.47
N$14
  Top 0.254: WS7.I 30.78,60.2 30.78,58.93 32.05,57.66 32.05,56.9 32.82,56.9 34.09,55.63 34.34,55.63 WS6.O
N$15  (via drill 0.33)
  Top 0.254: v44.75,55.88 45.77,55.88 RN2.1 | v44.25,60.2 43.48,60.96 42.72,60.96 IC1.17
  Bottom 0.254: v44.75,55.88 44.25,56.39 v44.25,60.2
N$17  (via drill 0.33)
  Top 0.254: v43.99,54.1 43.99,56.39 44.25,56.64 45.26,56.64 45.77,57.15 RN2.8 | v45.77,45.72 47.04,44.45 v47.04,41.4
  Bottom 0.254: v43.99,54.1 45.77,52.32 v45.77,45.72 | v47.04,41.4 43.99,38.35 43.99,31.24 42.98,30.23 41.71,30.23 41.71,33.27 41.96,33.53 LED1.A
N$18  (via drill 0.33)
  Top 0.254: v46.79,58.42 46.79,57.4 RN2.7
  Bottom 0.254: v46.79,58.42 46.79,54.1 46.53,53.85 46.53,44.7 45.77,43.94 LED2.A
N$19
  Top 0.254: WS4.O 40.94,41.91 40.94,44.2 41.71,44.2 44.25,46.74 WS5.I
N$20  (via drill 0.33)
  Top 0.254: v38.4,54.61 39.67,55.88 WS6.I | v38.4,50.55 39.17,49.78 39.93,49.78 WS5.O
  Bottom 0.254: v38.4,50.55 v38.4,54.61
N$21  (via drill 0.33)
  Top 0.254: v28.24,21.59 31.55,21.59 32.31,20.83 RD+1.2 | v26.72,23.11 25.7,22.1 IC3.4
  Bottom 0.254: v26.72,23.11 v28.24,21.59
N$22
  Top 0.254: IC3.3 26.21,21.59 26.97,22.35 33.83,22.35 34.34,22.86 37.9,22.86 40.18,20.57 RD-1.2
N$23  (via drill 0.33)
  Top 0.254: v24.94,28.7 26.21,28.7 26.72,28.19 WS2.I | v24.18,31.24 23.16,32.26 WS1.O
  Bottom 0.254: v24.94,28.7 24.18,29.46 v24.18,31.24
N$24
  Top 0.254: WS2.O 30.78,31.24 32.31,29.72 35.61,29.72 WS3.I
N$25
  Top 0.254: WS3.O 37.13,34.8 37.13,39.62 40.44,39.62 42.98,37.08 WS4.I
N$26  (via drill 0.33)
  Top 0.254: v48.82,58.93 47.55,58.93 47.55,57.4 RN2.6 | v46.02,54.61 45.77,54.36 45.26,54.36 44.75,53.85 44.75,53.34 43.48,53.34 42.72,54.1 LED3.A
  Bottom 0.254: v48.82,58.93 48.82,62.23 48.56,62.48 46.02,62.48 v46.02,54.61
N$27
  Top 0.254: WS9.I 13.77,51.31 13.77,53.34 13.26,53.85 13.26,55.63 15.8,55.63 18.08,53.34 19.35,53.34 WS8.O
N$28  (via drill 0.33)
  Top 0.254: v21.89,61.21 22.66,61.98 24.69,61.98 24.69,60.2 25.45,59.44 26.47,59.44 26.47,57.15 WS7.O | v21.89,57.66 21.13,58.42 20.88,58.42 WS8.I
  Bottom 0.254: v21.89,57.66 v21.89,61.21
N$29  (via drill 0.33)
  Top 0.254: v35.1,49.78 36.88,48.01 42.47,48.01 43.99,49.53 53.39,49.53 53.39,55.88 53.14,56.13 51.36,56.13 50.34,57.15 48.56,57.15 RN2.5
  Bottom 0.254: v35.1,49.78 34.59,50.29 34.59,59.94 34.09,60.45 LED4.A
N$30  (via drill 0.33)
  Top 0.254: v17.83,59.18 18.59,59.94 21.64,59.94 22.15,59.44 22.91,59.44 23.93,58.42 LED5.K
  Bottom 0.254: 14.27,43.69 16.31,41.66 16.31,35.81 16.81,35.31 LED8.K | 14.27,43.69 14.02,43.94 LED7.K 14.27,43.69 | 14.27,43.69 14.27,49.28 11.99,51.56 11.99,52.83 16.56,52.83 LED6.K 16.81,52.83 16.81,58.17 v17.83,59.18
N$31  (via drill 0.33)
  Top 0.254: v20.88,9.91 19.86,9.91 T1.1
  Bottom 0.254: v20.88,9.91 22.4,8.38 22.4,5.59 NKA.6 22.66,5.08 22.66,4.57 20.37,2.29 NKA1.7
N$32  (via drill 0.33)
  Top 0.254: v23.16,53.34 24.43,52.07 27.74,52.07 RN1.8
  Bottom 0.254: v23.16,53.34 22.66,53.85 22.66,59.94 23.16,60.45 LED5.A
N$33  (via drill 0.33)
  Top 0.254: v26.72,55.12 27.23,55.12 27.74,54.61 RN1.5
  Bottom 0.254: v26.72,55.12 25.45,56.39 25.45,63.75 21.39,67.82 21.39,69.09 20.62,69.85 14.78,69.85 14.78,54.36 LED6.A
N$34  (via drill 0.33)
  Top 0.254: v25.7,53.59 27.74,53.59 RN1.6 | v23.67,51.56 20.62,48.51 13.77,48.51 v13.51,48.77
  Bottom 0.254: v23.67,51.56 v25.7,53.59 | v13.51,48.77 11.48,46.74 11.48,44.2 LED7.A
N$35  (via drill 0.33)
  Top 0.254: v8.69,57.91 18.08,57.91 21.89,54.1 23.67,54.1 24.94,52.83 27.74,52.83 RN1.7 | v8.43,41.15 9.45,40.13 v11.48,40.13
  Bottom 0.254: v8.69,57.91 8.43,57.66 v8.43,41.15 | v11.48,40.13 14.78,36.83 14.78,34.04 LED8.A
N$37  (via drill 0.33)
  Top 0.254: v35.36,52.07 29.26,52.07 RN1.1 | v35.86,62.99 37.13,64.26 38.66,64.26 40.44,66.04 42.47,66.04 IC1.13
  Bottom 0.254: v35.36,52.07 36.12,52.83 36.12,62.74 v35.86,62.99
N$38  (via drill 0.33)
  Top 0.254: v30.28,52.83 29.26,52.83 RN1.2 | v29.51,61.72 29.77,61.98 34.85,61.98 35.1,61.72 v40.18,61.72 | v39.93,67.06 40.18,67.31 42.47,67.31 IC1.12
  Bottom 0.254: v30.28,52.83 29.51,53.59 v29.51,61.72 | v40.18,61.72 39.93,61.98 v39.93,67.06
N$39  (via drill 0.33)
  Top 0.254: v31.8,53.59 29.26,53.59 RN1.3 | v34.09,62.74 34.34,62.48 35.1,62.48 35.36,62.23 37.9,62.23 v40.69,65.02 | v40.69,68.07 41.2,68.58 42.47,68.58 IC1.11
  Bottom 0.254: v31.8,53.59 31.55,53.85 31.55,60.2 v34.09,62.74 | v40.69,68.07 v40.69,65.02
N$40  (via drill 0.33)
  Top 0.254: v40.18,58.93 35.36,54.1 34.85,54.1 34.59,54.36 29.26,54.36 RN1.4 | v45.01,68.33 43.48,69.85 42.72,69.85 IC1.10
  Bottom 0.254: v40.18,58.93 45.01,63.75 v45.01,68.33
RESET  (via drill 0.33)
  Top 0.254: v11.99,4.32 10.97,3.3 RST.B | v11.99,8.89 10.97,9.91 RST.B' | v22.4,23.37 21.13,23.37 19.86,24.64 19.35,24.64 18.59,25.4 IC3.13 18.34,25.65 17.83,26.16 v15.54,26.16 | v26.72,8.64 27.48,7.87 40.94,7.87 43.74,5.08 ISP.5 | v9.96,22.35 11.48,23.88 v13.26,23.88
  Bottom 0.254: v11.99,4.32 v11.99,8.89 7.16,8.89 7.16,19.05 9.96,21.84 v9.96,22.35 | v22.4,23.37 24.43,23.37 24.43,22.1 25.2,21.34 25.2,18.03 26.72,16.51 v26.72,8.64 | v15.54,26.16 v13.26,23.88
RX  (via drill 0.33)
  Top 0.254: 20.12,39.88 20.12,40.89 29.77,40.89 v30.02,41.15 | 20.12,39.88 20.12,37.59 23.16,34.54 25.2,34.54 26.21,35.56 JP5.4 | v1.32,39.37 1.57,39.62 10.72,39.62 11.23,39.12 15.8,39.12 16.56,39.88 20.12,39.88
  Bottom 0.254: v30.02,41.15 31.29,39.88 31.29,38.35 JP1.4 | v1.32,39.37 1.32,53.34 2.59,54.61 JP2.7
SCK  (via drill 0.33)
  Top 0.254: v36.12,25.65 v24.18,25.65 23.42,25.65 22.91,25.15 IC3.9 | v19.86,63.75 v31.04,63.75 | v22.4,30.23 v20.12,32.51
  Bottom 0.254: v36.12,25.65 38.15,23.62 38.15,18.29 37.13,17.27 | 37.13,17.27 36.37,17.27 MICROSD.5 | 37.13,17.27 38.4,16 38.4,6.86 37.64,6.1 37.64,1.27 39.42,1.27 39.93,1.78 39.93,3.56 41.2,4.83 ISP.3 | v31.04,63.75 32.82,65.53 RAD.5 | v19.86,63.75 19.35,63.25 19.35,42.16 20.12,41.4 20.12,37.34 20.37,37.08 20.37,32.77 v20.12,32.51 | v22.4,30.23 23.16,29.46 23.16,26.67 v24.18,25.65
SCL  (via drill 0.33)
  Top 0.254: v2.59,64.52 2.59,68.58 RSCL.1 | v4.11,46.48 2.59,46.48 2.34,46.74 EEPRM.6 | v18.85,21.59 18.59,21.84 16.56,21.84 15.8,22.61 IC3.18 | v20.88,38.1 22.66,39.88 v24.69,39.88 25.2,40.39 35.61,40.39 35.86,40.13 42.21,40.13 v42.98,39.37 | v47.29,59.69 51.61,59.69 IC1.1 | v34.09,30.99 34.34,31.24 37.39,31.24 38.15,30.48 41.96,30.48 v42.47,30.99 | v6.15,33.78 7.42,32.51 v10.21,32.51 | v13.51,29.21 18.59,29.21 19.1,28.7 v19.86,28.7
  Bottom 0.254: v2.59,64.52 1.32,63.25 1.32,61.21 2.59,59.94 JP2.3 2.59,59.69 0.56,57.66 0.56,37.34 2.08,37.34 4.11,39.37 | v4.11,46.48 6.15,44.45 6.15,41.4 4.11,39.37 | v18.85,21.59 19.86,22.61 v19.86,28.7 19.86,28.96 20.88,29.97 v20.88,38.1 | JP1.2 v24.69,39.88 | v47.29,59.69 47.55,59.44 47.55,54.1 47.04,53.59 47.04,43.43 43.48,39.88 | v42.98,39.37 43.48,39.88 | v34.09,30.99 34.09,33.02 31.55,35.56 JP5.2 | v42.47,30.99 43.48,32 43.48,39.88 | 4.11,39.37 6.15,37.34 v6.15,33.78 | v13.51,29.21 v10.21,32.51
SDA  (via drill 0.33)
  Top 0.254: v39.67,54.1 40.18,54.1 46.53,60.45 51.1,60.45 51.61,60.96 IC1.2 | v39.17,47.24 38.15,46.23 36.12,46.23 34.34,44.45 30.02,44.45 v29.77,44.7 | JP5.3 28.75,36.07 28.75,38.35 JP1.3 | 1.32,57.4 1.32,62.99 2.08,63.75 3.86,63.75 3.86,66.29 RSDA.1 | 1.32,57.4 2.59,57.4 JP2.5 | 15.8,21.08 15.8,19.3 10.97,19.3 9.7,20.57 v7.42,20.57 | 15.8,21.08 15.8,21.34 15.29,21.84 IC3.19 | v7.42,49.28 7.16,49.02 3.1,49.02 2.34,48.26 EEPRM.5 2.08,48.26 1.32,48.26 1.32,57.4 | v26.47,30.23 25.7,29.46 22.91,29.46 21.39,27.94 v17.32,27.94 | 15.8,21.08 v16.31,21.08
  Bottom 0.254: v39.67,54.1 39.17,53.59 v39.17,47.24 | v29.77,44.7 27.23,44.7 27.23,43.18 26.97,42.93 26.97,40.39 JP1.3 | v7.42,20.57 7.92,21.08 7.92,40.39 7.42,40.89 v7.42,49.28 | v26.47,30.23 26.47,33.53 28.75,35.81 JP5.3 | v17.32,27.94 16.31,26.92 v16.31,21.08
TX  (via drill 0.33)
  Top 0.254: 25.96,34.04 26.21,34.29 34.34,34.29 35.36,35.31 35.36,38.35 34.09,38.35 JP1.5 | 25.96,34.04 v25.7,33.78 | v5.38,41.91 11.48,41.91 11.99,42.42 13.51,42.42 15.54,40.39 17.32,40.39 v17.58,40.64 | v18.85,33.02 19.1,33.27 21.64,33.27 22.4,34.04 25.96,34.04
  Bottom 0.254: v25.7,33.78 25.7,34.04 23.93,35.81 JP5.5 | v5.38,41.91 2.59,44.7 2.59,52.07 JP2.9 | v17.58,40.64 18.85,39.37 v18.85,33.02
VBAT  (via drill 0.33)
  Top 0.254: v47.55,14.22 50.09,11.68 BAT1.P$2 | IC2.3 48.56,19.3 47.8,18.54 v47.55,18.54 v40.44,18.54 | v4.62,37.59 6.65,37.59 7.42,38.35 USB.1 7.67,38.61 14.53,38.61 16.56,36.58 v19.61,36.58 | v37.13,41.66 36.88,41.91 28.5,41.91 27.99,41.4 v18.85,41.4
  Bottom 0.254: v47.55,14.22 v47.55,18.54 | SWITCH.2 4.62,23.62 4.62,30.73 JP4.2 4.62,30.99 v4.62,37.59 | v40.44,18.54 40.18,18.8 40.18,33.02 37.13,36.07 v37.13,41.66 | v18.85,41.4 19.61,40.64 v19.61,36.58
VBUS  (via drill 0.33)
  Top 0.254: 22.15,46.99 23.67,48.51 JP3.1 | 22.15,46.99 20.62,45.47 20.37,45.47 20.37,43.94 20.12,43.69 19.86,43.69 19.35,43.18 C1.1 19.35,42.93 20.12,42.16 27.48,42.16 v27.74,42.42 | v17.58,60.2 7.42,60.2 5.38,62.23 JP2.2 | v18.59,47.24 18.85,46.99 22.15,46.99 | v25.7,24.89 25.2,24.89 24.18,23.88 IC3.7 | v42.21,11.43 46.28,15.49 47.55,15.49 48.56,16.51 IC2.4 | v43.48,8.13 43.99,8.64 49.83,8.64 51.87,6.6 RE1.2 | v42.72,24.38 45.01,26.67 X2.VBUS
  Bottom 0.254: v17.58,60.2 18.59,60.2 v18.59,47.24 | v25.7,24.89 27.23,26.42 27.23,33.53 27.48,33.78 32.56,33.78 32.56,31.24 33.58,30.23 | 33.58,30.23 34.85,30.23 34.85,34.8 35.86,35.81 35.86,40.39 | 35.86,40.39 35.86,41.91 34.09,43.69 34.09,45.97 JP6.1 | v42.21,11.43 39.93,9.14 39.93,4.32 38.91,3.3 38.91,2.54 ISP.2 | v43.48,8.13 43.23,8.38 43.23,10.41 v42.21,11.43 | v42.72,24.38 42.21,23.88 42.21,17.78 | v42.21,11.43 42.21,17.78 | 33.58,30.23 33.32,29.97 33.32,28.19 34.34,27.18 39.67,27.18 39.67,18.03 39.93,17.78 42.21,17.78 | v27.74,42.42 31.55,42.42 31.55,40.64 31.8,40.39 35.86,40.39
VCC  (via drill 0.33)
  Top 0.254: WS8.D 17.58,56.13 16.56,57.15 v10.72,57.15 5.38,57.15 JP2.6 | IC3.6 24.43,23.11 23.93,22.61 v23.16,22.61 20.37,22.61 v19.1,23.88 18.08,24.89 IC3.14 | WS1.D 20.88,29.72 v19.35,29.72 15.8,29.72 v15.04,30.48 | v11.99,35.56 12.5,35.56 13.77,36.83 WS10.D | v10.72,46.48 11.73,46.48 12.5,47.24 WS9.D | v9.96,43.43 3.1,43.43 2.34,44.2 EEPRM.8 | v28.24,58.67 26.72,60.2 WS7.D | JP6.3 28.75,46.23 28.75,48.51 JP3.3 | CEXP1.1 52.12,58.93 53.14,58.93 53.39,59.18 53.39,66.04 51.87,66.04 IC1.6 51.61,66.29 v44.25,66.29 | 39.42,59.69 42.47,59.69 IC1.18 | 39.42,59.69 37.9,59.69 36.63,58.42 WS6.D | 5.89,67.56 5.89,68.58 4.88,68.58 RSCL.2 | 5.89,67.56 5.89,66.55 RSDA.2 6.15,66.29 6.15,64.77 8.69,62.23 U$1.+ 8.94,61.98 9.7,61.98 v10.72,60.96 | 28.24,69.85 19.35,69.85 17.07,67.56 5.89,67.56 | 28.24,69.85 36.37,69.85 37.9,68.33 RAD.2 | v39.42,60.96 39.42,59.69 | 28.24,69.85 v28.24,69.6 | 22.66,9.65 20.88,7.87 T1.2 20.62,7.62 19.61,6.6 v15.54,6.6 | 22.66,9.65 T2.2 23.42,9.65 v24.69,10.92 | 22.66,9.65 21.89,9.65 21.89,12.19 IC3.34 | v5.38,16 5.64,16 6.4,16.76 IC4.2 | v6.91,2.79 6.91,1.52 C9.1 | IC3.24 14.02,17.27 12.24,15.49 12.24,12.19 4.62,12.19 3.1,10.67 THM1.2 | v27.99,24.38 28.5,24.38 29.26,23.62 C3.1 | v28.24,28.96 29.01,28.19 30.53,28.19 WS2.D 30.78,27.94 35.61,27.94 36.37,28.7 43.23,28.7 43.23,31.24 | 43.23,31.24 43.23,31.5 42.98,31.75 39.17,31.75 WS3.D | 25.45,17.27 25.96,16.76 IC3.42 | 25.45,17.27 25.45,18.54 26.72,18.54 27.23,18.03 IC3.44 27.48,17.78 27.99,17.27 33.83,17.27 v34.85,16.26 46.53,16.26 48.31,18.03 v48.56,18.03 | 43.99,21.08 44.5,20.57 RU1.2 43.99,21.08 | 43.99,21.08 43.23,21.84 41.2,21.84 39.67,23.37 C4.1
  Top 0.254: 43.99,21.08 v47.04,21.08 | v51.61,38.86 46.02,38.86 44.25,40.64 WS4.D 43.99,40.89 v42.98,41.91 | v41.96,49.28 43.23,50.55 WS5.D | 43.23,31.24 47.04,31.24 47.29,31.5 48.31,31.5 49.58,30.23 v50.09,30.23 | 25.45,17.27 v24.69,17.27
  Bottom 0.254: v19.35,29.72 19.1,29.46 v19.1,23.88 | v15.04,30.48 13.51,32 13.51,34.04 v11.99,35.56 9.7,37.85 9.7,43.43 | 9.7,43.43 9.7,44.2 10.46,44.96 10.46,46.23 v10.72,46.48 v10.72,57.15 v10.72,60.96 | 9.7,43.43 v9.96,43.43 | JP3.3 28.75,48.77 28.75,58.17 v28.24,58.67 v28.24,69.6 | v39.42,60.96 39.42,66.29 38.15,67.56 38.15,68.07 RAD.2 38.15,68.33 38.15,69.09 41.45,69.09 v44.25,66.29 | v5.38,16 4.11,14.73 4.11,11.68 3.1,10.67 THM1.2 3.1,10.41 4.62,8.89 4.62,5.08 v6.91,2.79 6.91,2.29 11.23,2.29 v15.54,6.6 | v27.99,24.38 28.24,24.64 v28.24,28.96 | v34.85,16.26 34.85,16 36.12,16 MICROSD.4 | v47.04,21.08 47.8,20.32 | 47.8,20.32 49.33,18.8 | 49.33,18.8 50.34,17.78 50.34,8.38 50.85,7.87 RSD.2 | v51.61,38.86 52.88,37.59 52.88,30.23 | 52.88,30.23 52.88,25.4 47.8,20.32 | v41.96,49.28 41.71,49.02 41.71,43.18 v42.98,41.91 | 49.33,18.8 v48.56,18.03 | 52.88,30.23 v50.09,30.23 | v24.69,10.92 v24.69,17.27 24.69,21.08 v23.16,22.61

## Text on the board
tPlace: L5 | L4 | L6 | L3 | L7 | L2 | L8 | L1
tNames: publiclab.org/wiki/open-lux | ***** | OPEN | LUX | **** | REV-T | GND | VCC | A0 | A1 | VBUS | PUBLIC | LAB | .org | publiclab.org/wiki/open-lux | A2 | SCL | SDA | RX | TX | VBAT | GND | USB
bNames: MOSI | (X) | A4 | VCC | Hardware License | SCK | GND | A2 | MISO | GND | A5 | A1 | VCC | CERN Open | Ver. 1.1 | A0 | VBUS | TX | SCL | RX | SDA | VBUS | A1 | A0 | VCC | GND | TX | SCL | A2 | RX | SDA | PUBLICLAB.ORG/WIKI/OPEN-LUX | D10 | GND | LED | LCD | D9 | D11 | D11 | GND | D12 | GND | LCD | D9 | D10 | GND | D12 | LED | MISO | SCK | RST | VBUS | GND | MOSI